# Altium PCB PCB1.PcbDoc
Units mil, origin at the board's own origin, x right, y up, seen from the top; angles counter-clockwise.
Board outline 3005 x 2010 mil, 2 copper layers (Top Layer, Bottom Layer); 8 components, 3 nets, 33 pads, 0 vias.
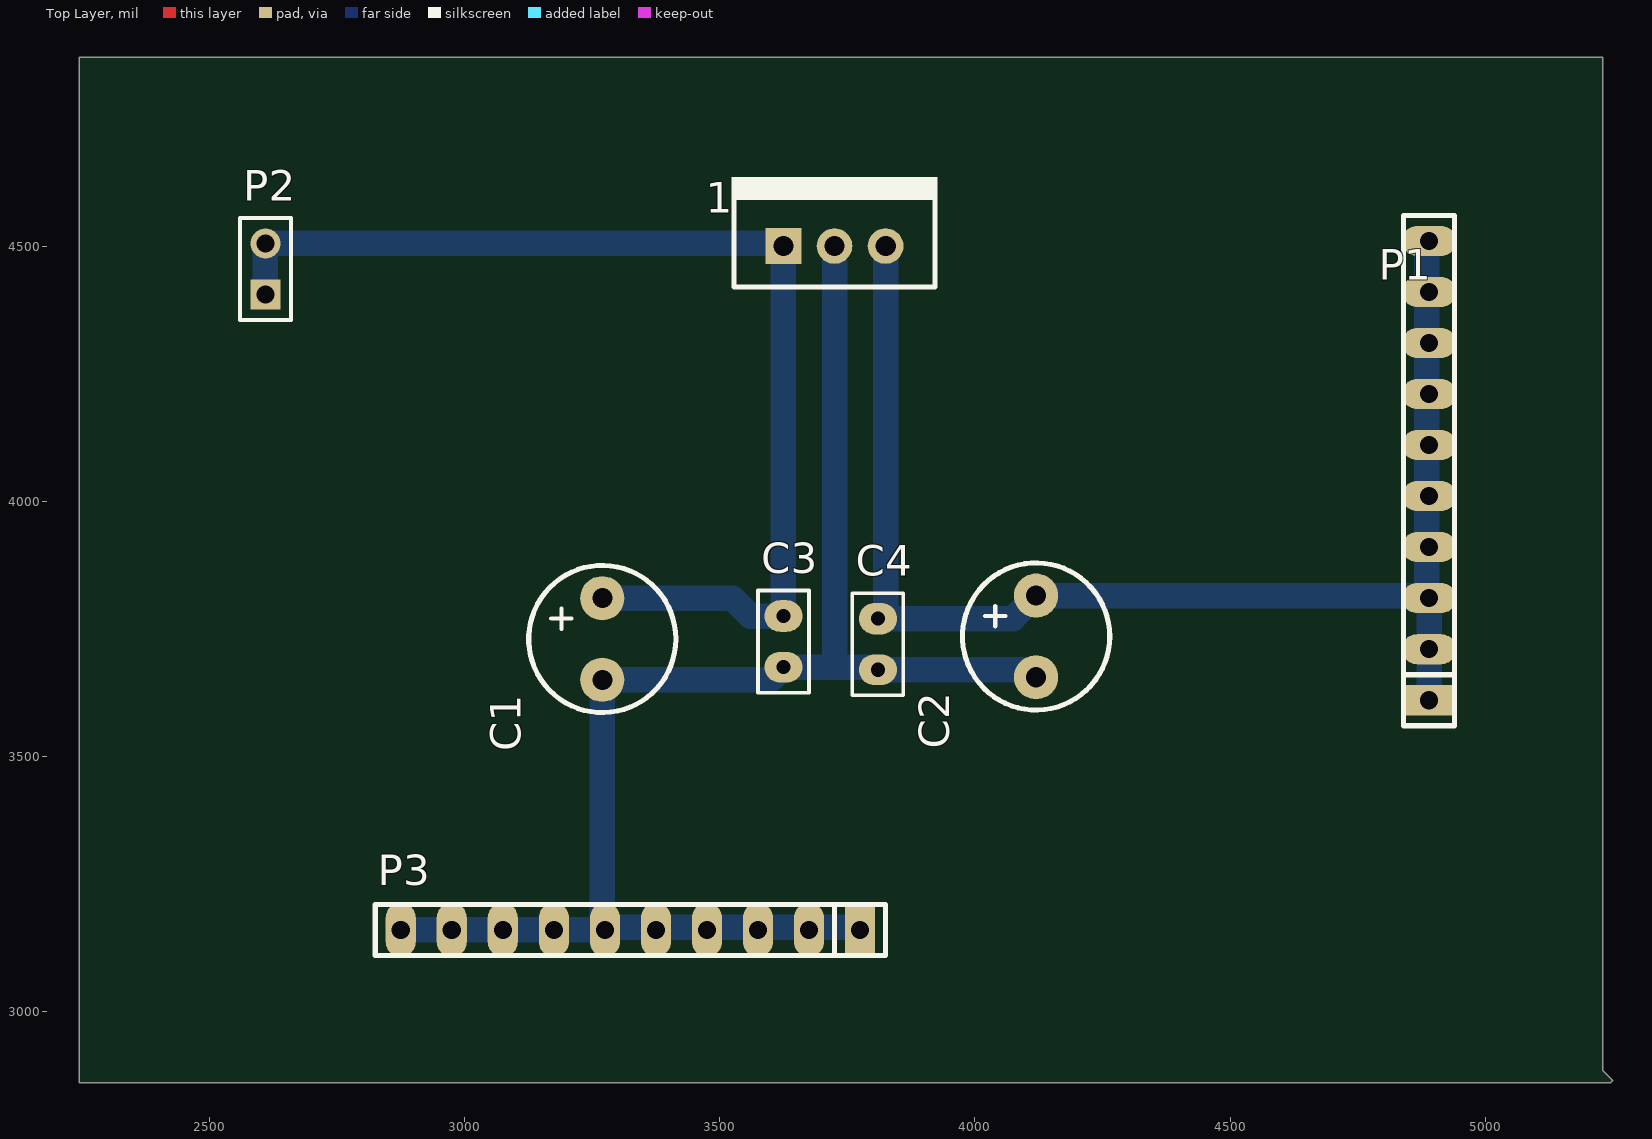
[diagram p0: Top Layer view]
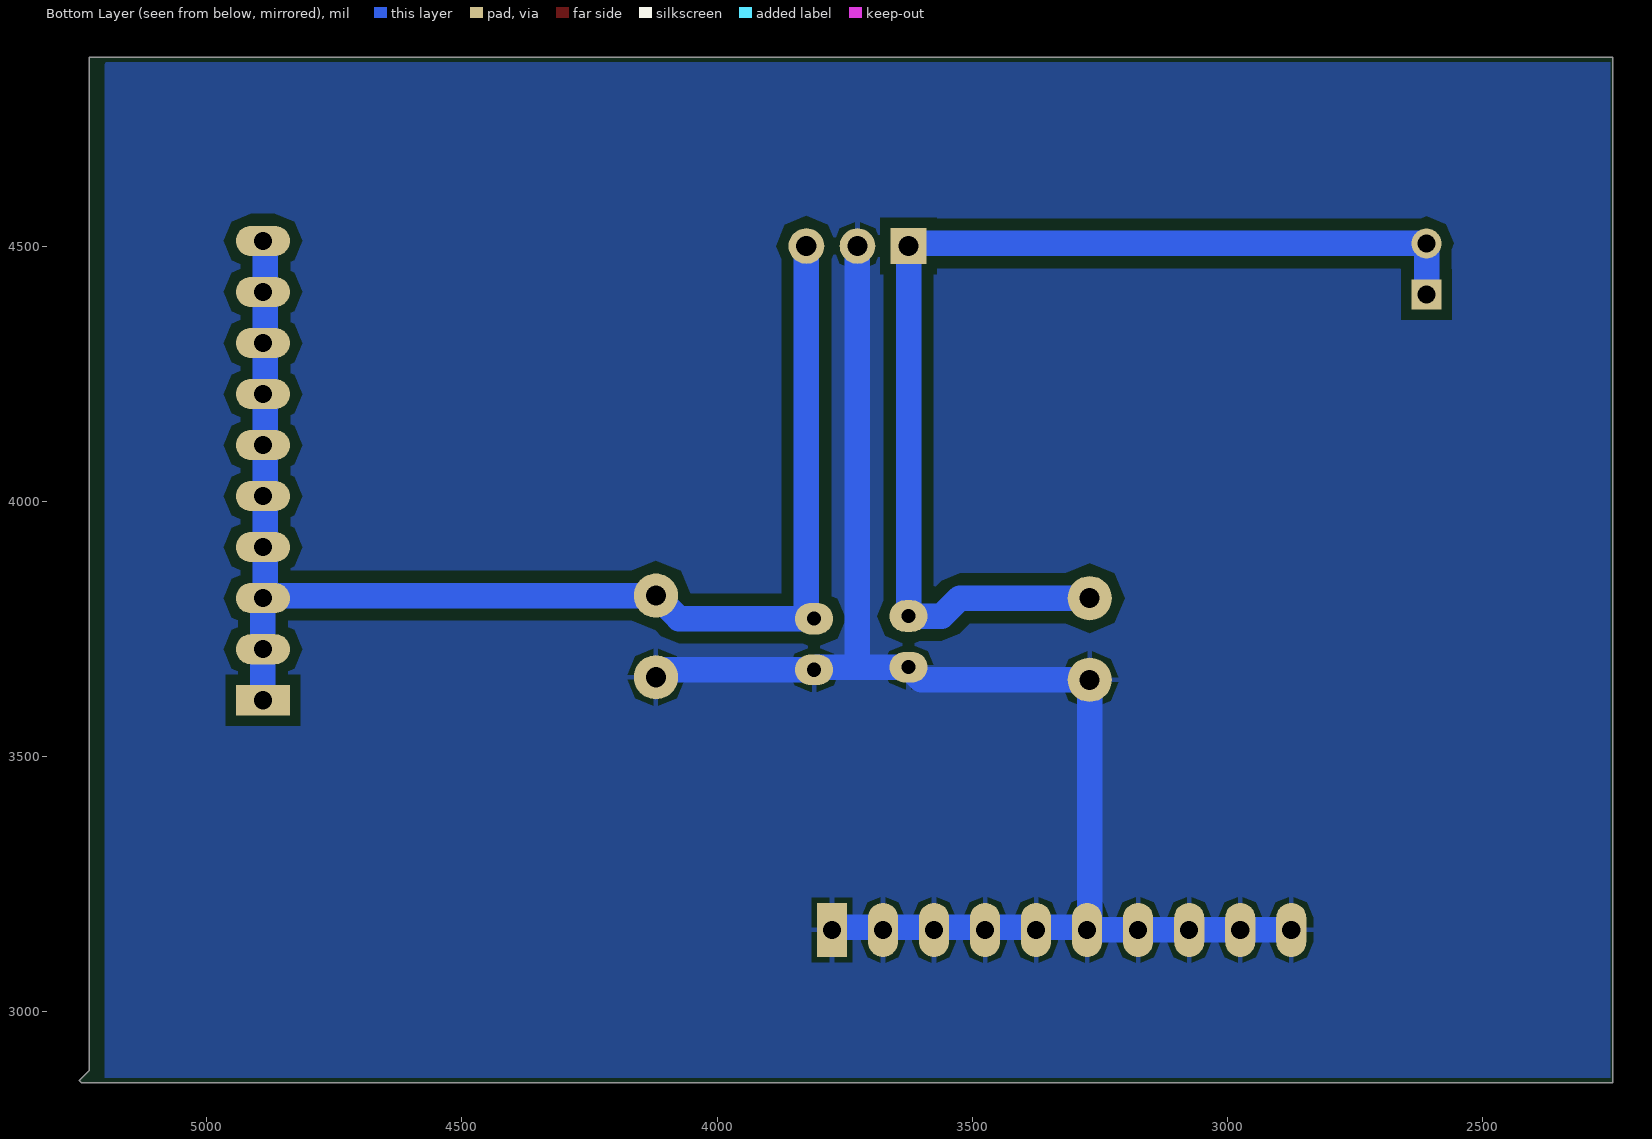
[diagram p1: Bottom Layer view, seen from below]

## Layer stack, top to bottom
Top Layer: signal copper 1.4
Dielectric: dielectric 12.6, FR-4, Dk 4.8
Bottom Layer: signal copper 1.4

## Board outline
2245,4870 2245,2860 5245,2860 5250,2865 5230,2885 5230,4870

## Design rules (kind name [scope] priority, off if disabled: settings)
Clearance [All] p1: gap=20
PolygonConnect [All] p1: connectstyle=Relief reliefconductorwidth=10 reliefentries=4 polygonreliefangle="90 Angle" airgapwidth=10
RoutingVias [All] p1: holewidth=28 width=50 viastyle="Through Hole" minholewidth=28 minwidth=50 maxholewidth=28 maxwidth=50
SolderMaskExpansion [All] p1: expansion=4
Width [All] p1: maxlimit=100 minlimit=10 preferedwidth=50
28 further rules are at their usual default settings.

## Components (designator, comment, footprint, x,y, rotation, side; value= is the part's Value field where it differs from the comment)
1 "7805" TO-220 3625,4500 r0 top
C1 "Cap2" RB2 3250,3810 r90 top
C2 "Cap2" RB2 4100,3815 r90 top
C3 "Cap1" RAD0.1 3625,3675 r90 top
C4 "Cap1" RAD0.1 3810,3670 r90 top
P1 "Header 10" SIP-10 4890,3610 r90 top
P2 "Header 2" HDR2X1_A 2610,4405 r90 top
P3 "Header 10" SIP-10 3775,3160 r180 top

## Footprints (in the part's own frame and the unit in brackets; to place one, negate y for a bottom-side part, rotate by r counter-clockwise, add the part's x,y. Pads: shape width x height; smd on the part's side, far side on the other; paste and mask are expansions set on the pad)
HDR2X1_A [mm] "Connector; Header; 2 Position"
  rect 1.5x1.5 hole 0.9: 1(0,0)
  round 1.5 hole 0.9: 2(2.54,0)
  silkscreen extent -1.27,-1.27 3.81,1.27
RAD0.1 [mil]
  oval 60x75 hole 28: 1(0,0)
  oval 62x75 hole 28: 2(100,0)
  silkscreen extent -50,-50 150,50
RB2 [mm]
  round 2.2 hole 1: 1(0,-0.508) 2(-4.064,-0.508)
  silkscreen extent -5.69,-4.17 1.63,3.15
SIP-10 [mm]
  rect 1.5x2.7 hole 0.9: 1(0,0)
  oval 1.5x2.7 hole 0.9: 2(2.54,0) 3(5.08,0) 4(7.62,0) 5(10.16,0) 6(12.7,0) 7(15.24,0) 8(17.78,0) 9(20.32,0) 10(22.86,0)
  silkscreen extent -1.27,-1.27 24.13,1.27
TO-220 [mil]
  rect 70x70 hole 40: 1(0,0)
  round 70 hole 40: 2(100,0) 3(200,0)
  silkscreen extent -102,-80 302,135

## Part data
P1 P3: "Header, 10-Pin"
P2: "接插件"

## Nets (pads, with @x,y where several pads share a name; then routed paths per layer and width w, separated by ;. In a path a pad name is that pad's centre, name@x,y a point inside that pad or via, vN(x,y) a via of type N, cw(c..) or ccw(c..) an arc to the next point about the centre after c; other vN are vias at no path point)
5V: 1.3 C2.1 C4.2 P1.1 P1.2 P1.3 P1.4 P1.5 P1.6 P1.7 P1.8 P1.9 P1.10 | length 2719.9
  Bottom Layer w50: 1.3 3825,3785 C4.2 4075,3770 C2.1 4885,3815 P1.10@4885,4505 ; P1.1 P1.2 P1.3
GND: 1.2 C1.2 C2.2 C3.1 C4.1 P3.1 P3.2 P3.3 P3.4 P3.5 P3.6 P3.7 P3.8 P3.9 P3.10 | length 3068.6
  Bottom Layer w50: P3.10 P3.9 P3.8 P3.7 P3.6 ; 3725,3685 1.2 ; P3.1 3770,3165 3270,3165 C1.2 3600,3650 C3.1 C4.1@3805,3675 ; C4.1 4105,3670 C2.2
INPUT: 1.1 C1.1 C3.2 P2.1 P2.2 | length 2211.6
  Bottom Layer w50: P2.1 P2.2 3620,4505 1.1 C3.2 3560,3775 3525,3810 C1.1

## Polygon pours and split planes (outlines as drawn)
GND on Bottom Layer "Bottom Layer-No Net" (solid, remove dead copper, pour order 4): 2250,2870 5200,2870 5200,4855 5205,4860 2250,4860